# EAGLE board Tractive System Active Light rev1 (EAGLE 9.5.2)
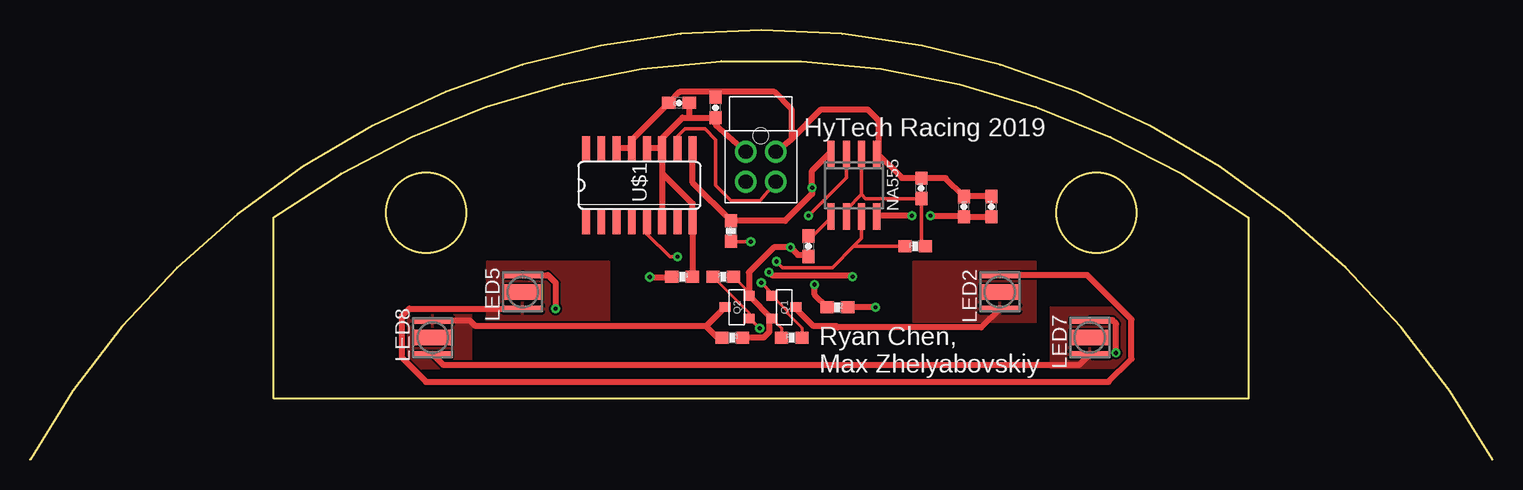
[diagram p0: board, top side]
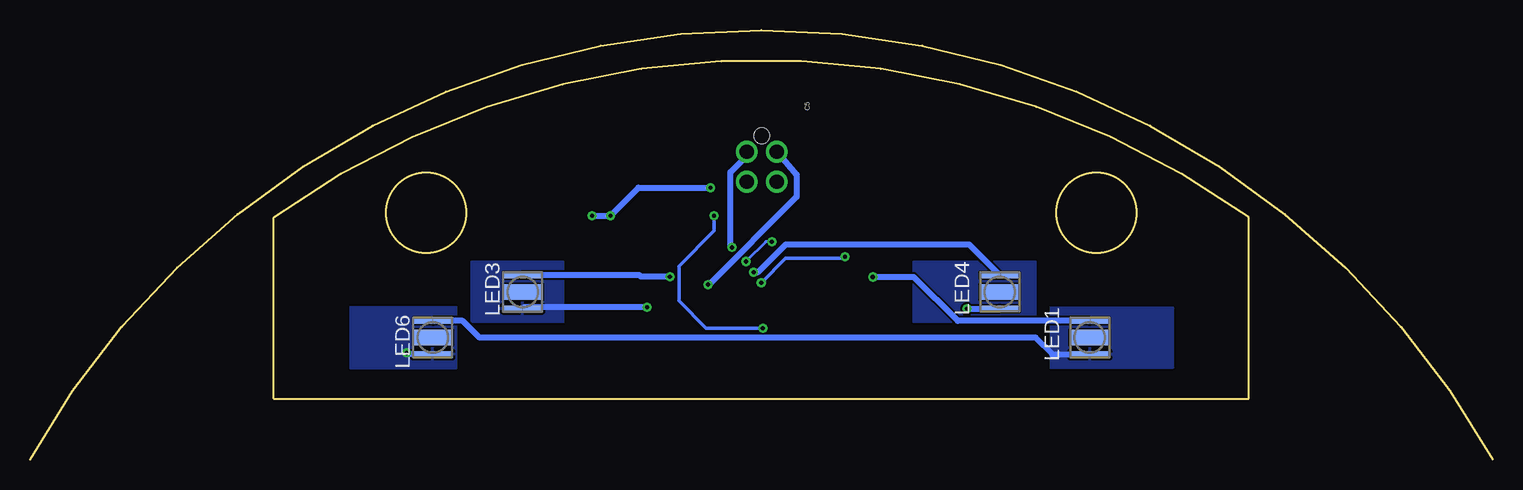
[diagram p1: board, bottom side, seen from below]

Size 121.92 x 35.8 mm. Coordinates in mm from the lower left corner, seen from the top.
Outline: 121.92,0 arc122 0,0
Outline: 101.6,5.08 20.32,5.08 20.32,20.19 arc-71 101.6,20.17 101.6,5.08
Outline: circle at 88.9,20.57 radius 3.35
Outline: circle at 33.02,20.57 radius 3.35
Copper layers (1*16): Top 0.035mm / dielectric 1.5mm / Bottom 0.035mm
Design rules "DRC Advanced Circuits": minimum track width 6mil, minimum drill 10mil, track to track 6mil, track to pad 6mil, pad to pad 6mil, via to via 6mil, smd to smd 6mil, copper to edge 40mil, drill to drill 6mil, minimum pad ring 10mil, minimum via ring 8mil, stop-mask expansion 4mil, vias tented up to drill 0mil, thermal gap 10mil

## Footprints (pad centres in the part's own frame; a part is rotated, then mirrored left to right if it is on the bottom)
0603-CAP = smd 1.1 x 1: 1 -0.85,0; 2 0.85,0
XP-E2 = smd 0.5 x 3.3: A -1.4,0; C 1.4,0 | smd 1.3 x 3.3: X 0,0
SO8 = smd 0.6 x 2.2: 1 -1.905,-2.6; 2 -0.635,-2.6; 3 0.635,-2.6; 4 1.905,-2.6; 5 1.905,2.6; 6 0.635,2.6; 7 -0.635,2.6; 8 -1.905,2.6
SOT23 = smd 0.8 x 0.9: 1 -0.95,-1; 2 0.95,-1; 3 0,1
0603-RES = smd 1.1 x 1: 1 -0.85,0; 2 0.85,0
SO16 = smd 0.66 x 2.032: 1 -4.445,-3.073; 2 -3.175,-3.073; 3 -1.905,-3.073; 4 -0.635,-3.073; 5 0.635,-3.073; 6 1.905,-3.073; 7 3.175,-3.073; 8 4.445,-3.073; 9 4.445,3.073; 10 3.175,3.073; 11 1.905,3.073; 12 0.635,3.073; 13 -0.635,3.073; 14 -1.905,3.073; 15 -3.175,3.073; 16 -4.445,3.073
NANO-FIT_VERTICAL-4 = drill 1.2: P$1 -1.25,0; P$2 1.25,0; P$3 -1.25,2.5; P$4 1.25,2.5 | hole 1.3: 0,-1.34

## Placement (x,y rotation side)
C1  4.7uF  [0603-CAP]  74.3,22.61 90 top
C2  10nF  [0603-CAP]  64.9,17.78 270 top
C3  0.1uF  [0603-CAP]  77.85,21.08 90 top
C4  1uF  [0603-CAP]  80.14,21.08 90 top
C5  1uF  [0603-CAP]  57.15,29.34 90 top
C6  0.1uF  [0603-CAP]  54.1,29.72 180 top
LED1  RED  [XP-E2]  33.58,10.16 270 bottom
LED2  GRN  [XP-E2]  80.85,13.97 270 top
LED3  GRN  [XP-E2]  80.85,13.97 90 bottom
LED4  GRN  [XP-E2]  41.07,13.97 270 bottom
LED5  GRN  [XP-E2]  41.07,13.97 270 top
LED6  RED  [XP-E2]  88.34,10.16 270 bottom
LED7  RED  [XP-E2]  88.34,10.16 270 top
LED8  RED  [XP-E2]  33.58,10.16 90 top
NA555  NA555SO-8  [SO8]  68.69,22.86 180 top
Q1  [SOT23]  62.87,12.7 270 top
Q2  [SOT23]  58.93,12.7 90 top
R1  2k  [0603-RES]  57.79,15.24 0 top
R2  330R  [0603-RES]  67.31,12.7 0 top
R3  50k  [0603-RES]  73.79,17.78 180 top
R4  330R  [0603-RES]  54.36,15.24 0 top
R5  1k  [0603-RES]  58.42,19.05 270 top
R6  2k  [0603-RES]  58.55,10.16 0 top
R7  2k  [0603-RES]  63.5,10.16 180 top
U$1  MAX4622  [SO16]  50.8,22.86 0 top
X1  CONNECTOR-4NANO-FIT-VERTICAL-4  [NANO-FIT_VERTICAL-4]  60.92,25.65 180 top

## Library data of the parts
C1-C6 LED1-LED8 NA555 Q1 Q2 R1-R7 U$1 X1 = HyTechDevices

## Nets
GND: C1.2 C2.2 C3.2 C4.2 C5.2 C6.2 NA555.1 Q1.2 Q2.2 R1.2 R6.2 R7.2 U$1.13 U$1.14 X1.P$1
GRN: Q1.1 R7.1 U$1.5
N$1: LED4.C LED5.A
N$2: LED2.C Q1.3
N$3: LED3.C LED4.A
N$5: LED3.A R2.2
N$8: C1.1 NA555.2 NA555.6 R3.1
N$9: NA555.7 R3.2 R5.2
N$10: LED8.C Q2.3 R6.1
N$11: LED1.A R4.1
N$13: C2.1 NA555.5
N$16: LED2.A LED5.C
N$17: LED1.C LED6.A
N$18: LED6.C LED7.A
N$19: LED7.C LED8.A
RED: NA555.3 Q2.1 R1.1
SIGNAL: U$1.10 X1.P$3
V555: C3.1 C4.1 NA555.4 NA555.8 R5.1 U$1.9
VCC: C5.1 C6.1 R2.1 R4.2 U$1.6 U$1.8 U$1.11 U$1.12 X1.P$2

## Tracks (layer width: path | path; a pad name or v marks a point on that pad's centre or on a via)
GND  (via drill 0.35)
  Top 0.152: 74.19,23.47 C1.2 | 70.69,25.45 NA555.1 | 64.9,17.07 C2.2
  Top 0.254: Q1.2 62.65,10.96 R7.2 | R1.2 59.93,13.95 59.93,13.69
  Top 0.508: 74.19,23.47 72.67,23.47 70.69,25.45 | NA555.1 70.72,25.59 70.72,28.29 69.83,29.18 65.95,29.18 63.47,26.7 | 64.9,17.07 64.01,17.07 v63.4,17.68 62,17.68 59.93,15.61 59.93,13.69 59.97,13.65 | 63.47,26.7 63.47,29.21 62.05,30.63 57.15,30.63 | C1.2 76.33,23.46 C3.2 C4.2 | U$1.14 U$1.13 50.16,26.63 C6.2 54.17,30.63 57.15,30.63 | C5.2 57.15,30.63 | 59.97,13.65 Q1.2 61.62,11.5 61.62,10.62 61.16,10.16 R6.2 | 59.97,13.65 Q2.2 | X1.P$1 63.47,26.7
  Bottom 0.152: 62.18,25.3 X1.P$1
  Bottom 0.508: v63.4,17.68 63.52,17.8 63.52,23.95 62.18,25.3
GRN  (via drill 0.35)
  Top 0.254: Q1.1 63.14,12.38 63.14,12.18 64.35,10.97 R7.1
  Top 0.305: v53.98,16.89 53.34,16.89 51.44,18.8 U$1.5 | v60.96,14.73 61.87,13.83 Q1.1
  Bottom 0.305: v53.98,16.89 54.1,16.76 58.93,16.76 v60.96,14.73
N$1  (via drill 0.35)
  Top 0.508: LED5.A 43.18,15.37 43.81,14.73 v43.81,12.57
  Bottom 0.508: v43.81,12.57 LED4.C
N$2
  Top 0.508: Q1.3 63.87,12.59 65.33,11.12 67.21,11.12 67.32,11.01 79.29,11.01 LED2.C
  pour Top: 83.82,16.51 83.82,11.43 73.66,11.43 73.66,16.51
N$3  (via drill 0.35)
  Top 0.508: v61.59,15.62 61.85,15.37 68.45,15.37 v68.58,15.24
  Bottom 0.508: LED3.C 71.12,15.37 70.99,15.24 v68.58,15.24 | v61.59,15.62 61.21,15.62 58.93,17.91 43.61,17.91 LED4.A
N$5  (via drill 0.35)
  Top 0.508: v70.48,12.7 R2.2
  Bottom 0.508: v70.48,12.7 80.72,12.7 LED3.A
  pour Bottom: 85.09,11.43 85.09,16.51 77.47,16.51 77.47,11.43
N$8
  Top 0.152: 68.1,20.88 68.1,20.27 NA555.6
  Top 0.305: 68.1,20.88 69.32,22.1 | R3.1 74.3,18.12 C1.1 69.66,21.76 69.32,22.1 | NA555.2 69.32,22.1
N$9  (via drill 0.35)
  Top 0.305: R5.2 58.46,18.16 v60.08,18.16 | v62.23,16.51 62.74,16 66.88,16 68.68,17.8 | NA555.7 69.32,18.45 68.68,17.8 | R3.2 68.71,17.78 68.68,17.8
  Bottom 0.254: v60.08,18.16 60.58,18.16 v62.23,16.51
N$10
  Top 0.508: LED8.C 36.7,11.56 37.14,11.12 56.35,11.12 | Q2.3 56.35,11.12 | 56.35,11.12 57.32,10.16 R6.1
  pour Top: 36.83,7.62 36.83,12.7 26.67,12.7 26.67,7.62
N$11  (via drill 0.35)
  Top 0.508: v51.66,15.21 53.48,15.21 R4.1
  Bottom 0.508: LED1.A 44.58,11.56 48.23,15.21 v51.66,15.21
N$13
  Top 0.152: 65.35,18.74 64.9,18.74 C2.1 | 66.73,20.12 NA555.5
  Top 0.305: 66.73,20.12 65.35,18.74
N$14
  pour Bottom: 38.1,16.51 38.1,11.43 48.26,11.43 48.26,16.51
N$16
  Top 0.508: LED2.A 88.14,15.37 91.82,11.68 91.82,8.38 89.92,6.48 33.02,6.48 30.99,8.51 30.99,11.94 31.62,12.57 LED5.C
  pour Top: 48.26,16.51 48.26,11.43 38.1,11.43 38.1,16.51
N$17
  Bottom 0.508: LED1.C 36.7,8.76 38.1,10.16 84.45,10.16 85.86,11.56 LED6.A
  pour Bottom: 36.83,7.62 36.83,12.7 26.67,12.7 26.67,7.62
N$18  (via drill 0.35)
  Top 0.152: 90.52,11.27 90.55,11.3 | 88.4,11.62 LED7.A
  Top 0.508: v90.52,8.89 90.52,11.27 | 90.55,11.3 90.23,11.62 88.4,11.62
  Bottom 0.152: 90.39,8.76 v90.52,8.89
  Bottom 0.508: LED6.C 90.39,8.76
  pour Bottom: 86.36,7.62 86.36,12.7 95.25,12.7 95.25,7.62
N$19
  Top 0.508: LED7.C 87.45,7.87 34.47,7.87 LED8.A
  pour Top: 85.09,7.62 85.09,12.7 95.25,12.7 95.25,7.62
RED  (via drill 0.35)
  Top 0.254: R1.1 59.93,12.25 Q2.1
  Top 0.305: NA555.3 68.05,23.47 v64.9,20.32 | Q2.1 60.03,11.75 v60.83,10.95
  Bottom 0.305: v64.9,20.32 64.9,19.05 67.83,16.12 67.83,13.22 65.56,10.95 v60.83,10.95
SIGNAL
  Top 0.152: U$1.10 53.98,26.92
  Top 0.305: 53.98,26.92 54.61,27.56 56.26,27.56 57.15,26.67 57.15,22.86 58.42,21.59 60.86,21.59 X1.P$3
V555  (via drill 0.35)
  Top 0.152: 66.73,25.6 NA555.4 | 77.76,20.32 C3.1
  Top 0.305: 71.12,20.32 71.06,20.26 NA555.8
  Top 0.508: U$1.9 55.25,23.07 R5.1 62.95,19.9 65.2,22.15 v65.2,22.66 65.2,24.08 66.73,25.6 | v75.06,20.32 77.76,20.32 | C3.1 C4.1 | v73.53,20.32 71.12,20.32 70.74,20.32
  Bottom 0.508: v75.06,20.32 v73.53,20.32 71.2,22.66 v65.2,22.66
VCC  (via drill 0.35)
  Top 0.508: R4.2 55.25,15.28 U$1.8 55.25,21.34 52.7,23.88 | U$1.11 U$1.12 | 54.99,28.49 54.4,28.49 52.7,26.8 U$1.11 | 54.99,28.49 C5.1 57.15,27.92 X1.P$2 | C6.1 54.95,28.53 54.99,28.49 | U$1.11 52.7,23.88 | 52.7,23.88 U$1.6 | R2.1 65.41,13.75 v65.41,14.58
  Bottom 0.508: X1.P$2 58.01,23.74 58.01,21.89 65.33,14.58 v65.41,14.58

## Text on the board
tNames: HyTech Racing 2019 | Ryan Chen, / Max Zhelyabovskiy